# Altium PCB 4158board.PcbDoc
Units mil, origin at the board's own origin, x right, y up, seen from the top; angles counter-clockwise.
Board outline 6000 x 4000 mil, 2 copper layers (Top Layer, Bottom Layer); 29 components, 34 nets, 125 pads, 39 vias.
Unrouted connection lines stored in the file: 15.
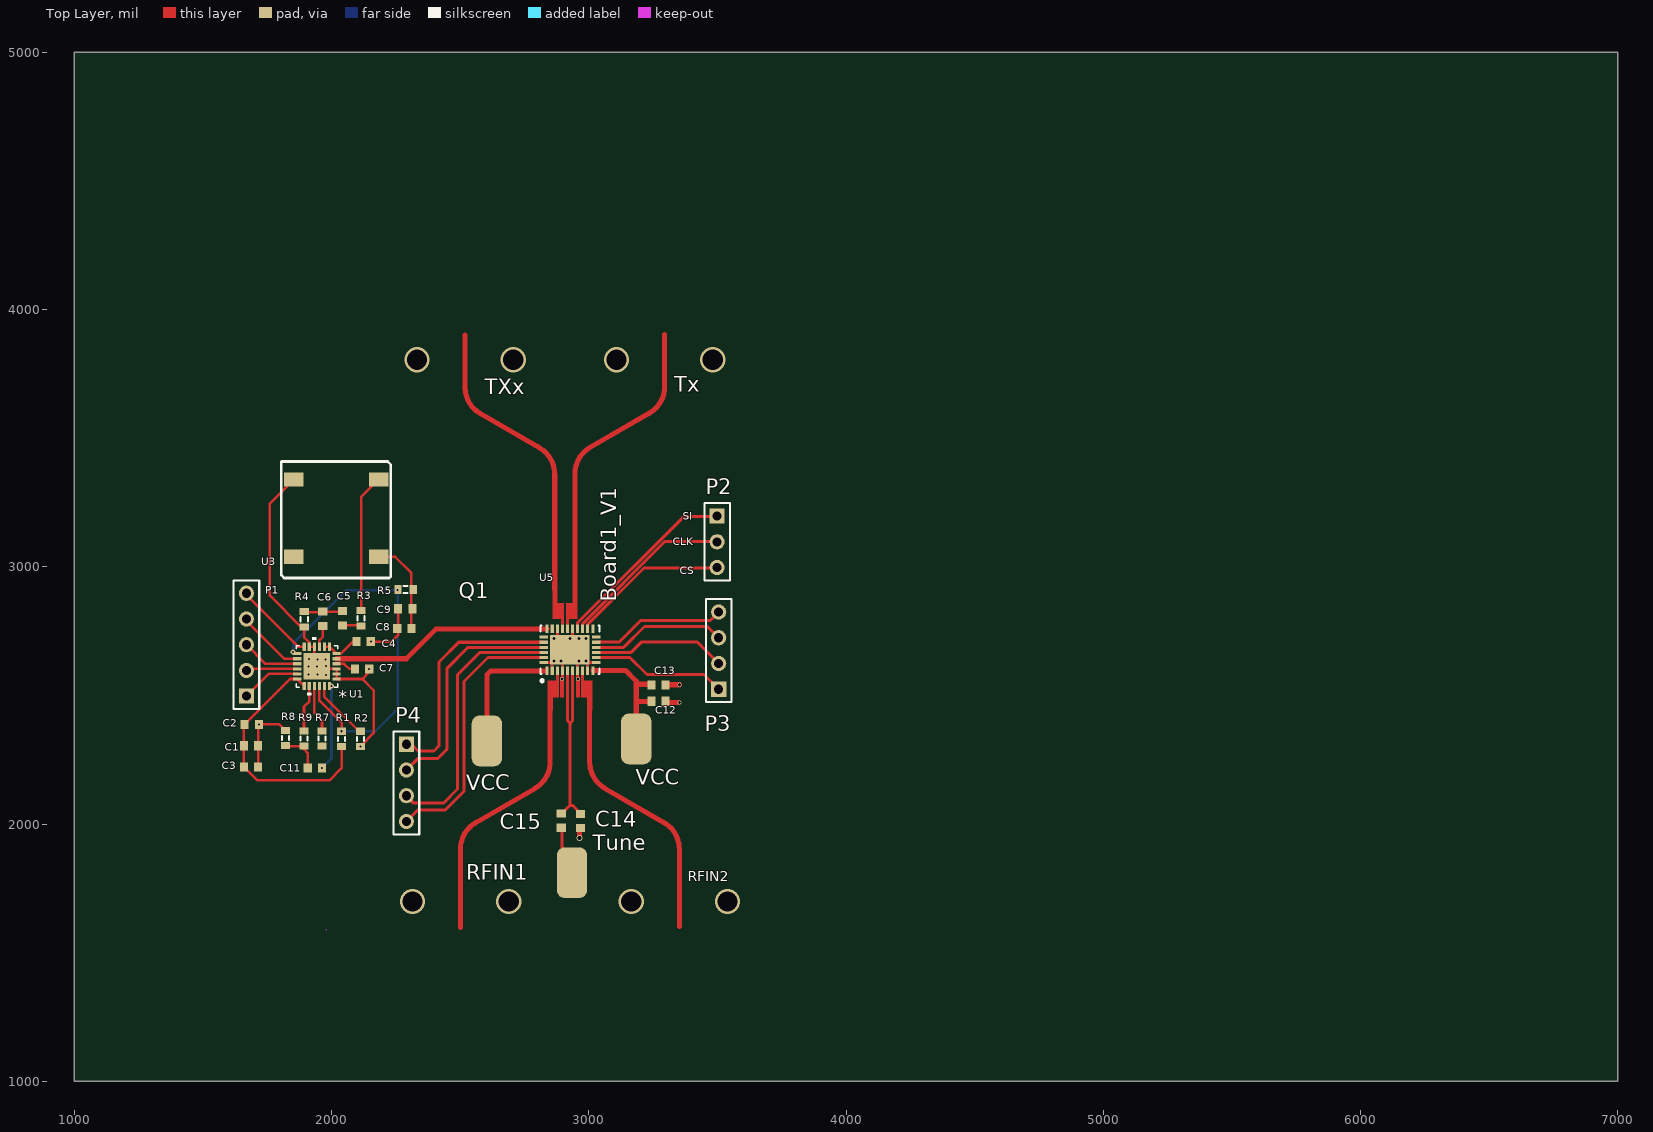
[diagram p0: Top Layer view]
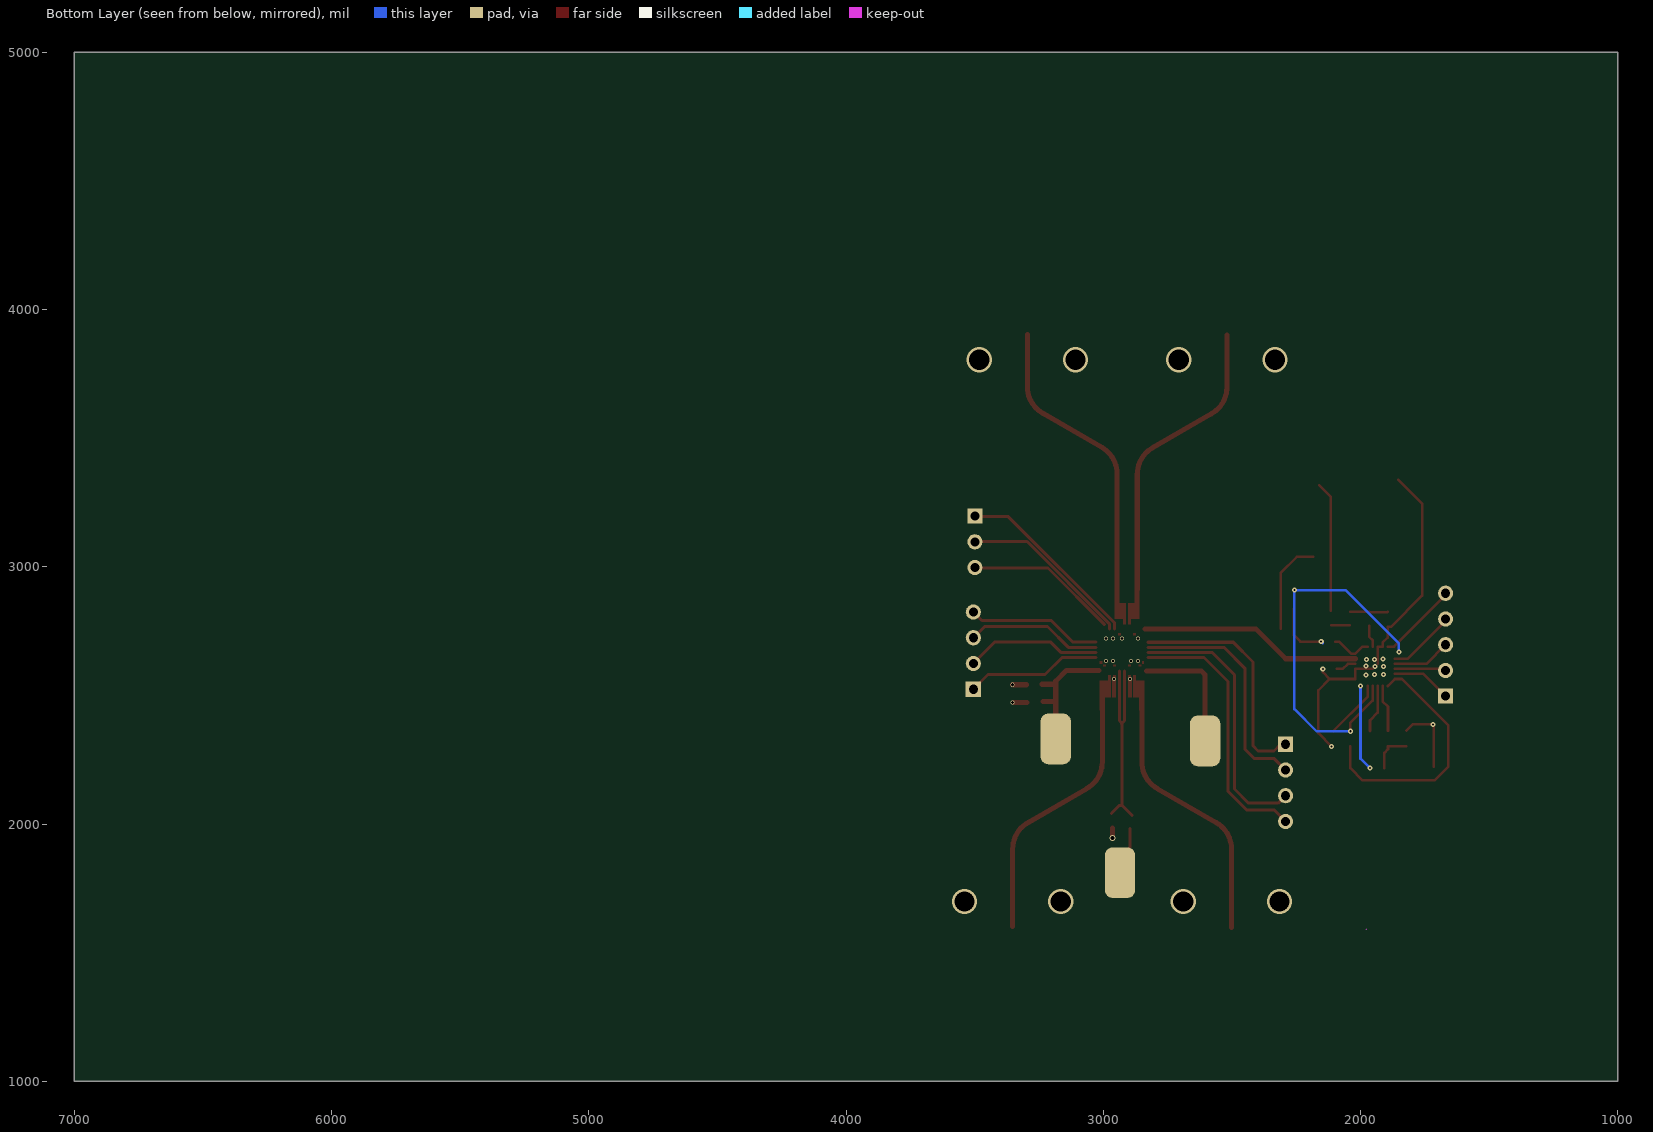
[diagram p1: Bottom Layer view, seen from below]

## Layer stack, top to bottom
Top Layer: signal copper 1.4
Dielectric: dielectric 12.6, FR-4, Dk 4.8
Bottom Layer: signal copper 1.4

## Board outline
1000,1000 7000,1000 7000,5000 1000,5000

## Design rules (kind name [scope] priority, off if disabled: settings)
Clearance [All] p1: gap=1
PolygonConnect [All] p1: connectstyle=Relief reliefconductorwidth=10 reliefentries=4 polygonreliefangle="90 Angle" airgapwidth=10
RoutingVias [All] p1: holewidth=28 width=50 viastyle="Through Hole" minholewidth=28 minwidth=50 maxholewidth=28 maxwidth=50
SolderMaskExpansion [All] p1: expansion=4
Width [All] p1: maxlimit=50 minlimit=10 preferedwidth=10
28 further rules are at their usual default settings.

## Components (designator, comment, footprint, x,y, rotation, side; value= is the part's Value field where it differs from the comment)
C1 "Cap Semi" 1608[0603] 1687,2304 r180 top
C2 "Cap Semi" 1608[0603] 1690,2387 r0 top
C3 "Cap Semi" 1608[0603] 1687,2222 r180 top
C4 "Cap Semi" 1608[0603] 2125,2709 r0 top
C5 "Cap Semi" 1608[0603] 2042,2800 r90 top
C6 "Cap Semi" 1608[0603] 1966,2798 r270 top
C7 "Cap Semi" 1608[0603] 2119,2603 r180 top
C8 "Cap Semi" 1608[0603] 2283,2760 r0 top
C9 "Cap Semi" 1608[0603] 2286.44,2837 r0 top
C11 "Cap Semi" 1608[0603] 1935,2217 r0 top
C12 "Cap Semi" 1608[0603] 3271,2477 r180 top
C13 "Cap Semi" 1608[0603] 3271,2541 r180 top
C14 "Cap Semi" 1608[0603] 2968,2012 r90 top
C15 "Cap Semi" 1608[0603] 2893,2013 r270 top
P1 "Header 5" HDR1X5 1669,2497 r90 top
P2 "Header 3" HDR1X3 3499,3197 r270 top
P3 "Header 4" HDR1X4 3505,2524 r90 top
P4 "Header 4" HDR1X4 2291,2310 r270 top
R1 "Res3" J1-0603 2039,2331 r270 top
R2 "Res3" J1-0603 2112,2331 r270 top
R3 "Res3" J1-0603 2115,2800 r270 top
R4 "Res3" J1-0603 1894,2796 r90 top
R5 "Res3" J1-0603 2288,2911 r180 top
R7 "Res3" J1-0603 1963,2332 r270 top
R8 "Res3" J1-0603 1821,2334 r90 top
R9 "Res3" J1-0603 1893,2332.53 r270 top
U1 "ADF4158CCPZ" CP_24_7 1943,2613 r180 top
U3 "CO" FOX801BE-100 2184,3039 r180 top
U5 "BGT24MTR12" QFN50P540X440X90_HS-33N 2927,2677 r90 top

## Footprints (in the part's own frame and the unit in brackets; to place one, negate y for a bottom-side part, rotate by r counter-clockwise, add the part's x,y. Pads: shape width x height; smd on the part's side, far side on the other; paste and mask are expansions set on the pad)
1608[0603] [mm] "Chip Capacitor, Body 1.6x0.8mm, IPC High Density"
  rect 0.8x0.9 smd: 1(-0.7,0) 2(0.7,0)
  body extent -0.87,-0.48 0.87,0.48, height 1.3
CP_24_7 [mil]
  rect 32x12 smd mask+5: 1(-76.5,49.21) 2(-76.5,29.53) 3(-76.5,9.84) 4(-76.5,-9.84) 5(-76.5,-29.53) 6(-76.5,-49.21) 13(76.5,-49.21) 14(76.5,-29.53) 15(76.5,-9.84) 16(76.5,9.84) 17(76.5,29.53) 18(76.5,49.21)
  rect 12x32 smd mask+5: 7(-49.21,-76.5) 8(-29.53,-76.5) 9(-9.84,-76.5) 10(9.84,-76.5) 11(29.53,-76.5) 12(49.21,-76.5) 19(49.21,76.5) 20(29.53,76.5) 21(9.84,76.5) 22(-9.84,76.5) 23(-29.53,76.5) 24(-49.21,76.5)
  rect 104x104 smd mask-51.5: 25(0,0)
  silkscreen extent -81,-112 81,112
FOX801BE-100 [mm]
  rect 1.9x1.4 smd: 1(0,0) 2(0,-7.62) 3(8.4,-7.62) 4(8.4,0)
  silkscreen extent -1.17,-9.4 9.62,2.1
HDR1X3 [mm] "Connector; Header; 3 Position"
  rect 1.5x1.5 hole 0.9: 1(0,0)
  round 1.5 hole 0.9: 2(2.54,0) 3(5.08,0)
  silkscreen extent -1.27,-1.27 6.35,1.27
HDR1X4 [mm] "Connector; Header; 4 Position"
  rect 1.5x1.5 hole 0.9: 1(0,0)
  round 1.5 hole 0.9: 2(2.54,0) 3(5.08,0) 4(7.62,0)
  silkscreen extent -1.27,-1.27 8.89,1.27
HDR1X5 [mm] "Connector; Header; 5 Position"
  rect 1.5x1.5 hole 0.9: 1(0,0)
  round 1.5 hole 0.9: 2(2.54,0) 3(5.08,0) 4(7.62,0) 5(10.16,0)
  silkscreen extent -1.27,-1.27 11.43,1.27
J1-0603 [mm] "Chip Resistor, Body 1.6x0.8mm, IPC High Density"
  rect 0.7x0.9 smd: 1(-0.75,0) 2(0.75,0)
  silkscreen extent -0.2,-0.35 0.2,0.35, body extent -0.85,-0.48 0.85,0.48, height 0.9
QFN50P540X440X90_HS-33N [mm] "QFN, 32-Leads, Body 5.40x4.40mm, Pitch 0.50mm, Thermal Pad 3.90x2.90mm, IPC Medium Density"
  rect 0.85x0.3 smd mask+0: 1(-2.075,2.25) 3(-2.075,1.25) 4(-2.075,0.75) 5(-2.075,0.25) 6(-2.075,-0.25) 7(-2.075,-0.75) 8(-2.075,-1.25) 9(-2.075,-1.75) 10(-2.075,-2.25) 17(2.075,-2.25) 18(2.075,-1.75) 19(2.075,-1.25) 20(2.075,-0.75) 21(2.075,-0.25) 22(2.075,0.25) 23(2.075,0.75) 24(2.075,1.25) 25(2.075,1.75) 26(2.075,2.25)
  rect 0.85x0.3 smd paste+0 mask+0: 2(-2.075,1.75)
  rect 0.3x0.85 smd mask+0: 11(-1.25,-2.575) 12(-0.75,-2.575) 13(-0.25,-2.575) 14(0.25,-2.575) 15(0.75,-2.575) 16(1.25,-2.575) 27(1.25,2.575) 28(0.75,2.575) 29(0.25,2.575) 30(-0.25,2.575) 31(-0.75,2.575) 32(-1.25,2.575)
  rect 2.9x3.9 smd mask+0: 33(0,0)
  Top Layer region: -6,-2.2 -4.7,-2.2 -4.7,-1.7 -6,-1.7
  Top Layer region: -6,1.7 -4.7,1.7 -4.7,2.2 -6,2.2
  Top Layer region: -4.7,-2.2 -3.05,-2.2 -3.05,-1.1 -4.7,-1.1
  Top Layer region: -3.05,-1.4 -2.5,-1.4 -2.5,-1.1 -3.05,-1.1
  Top Layer region: -4.7,1.1 -3.05,1.1 -3.05,2.2 -4.7,2.2
  Top Layer region: -3.05,1.1 -2.5,1.1 -2.5,1.4 -3.05,1.4
  Top Layer region: 4.65,-0.75 6.1,-0.75 6.1,-0.25 4.65,-0.25
  Top Layer region: 4.65,1.25 6.1,1.25 6.1,1.75 4.65,1.75
  Top Layer region: 3.049,0.6 4.649,0.6 4.649,1.75 3.049,1.75
  Top Layer region: 2.5,0.6 3.05,0.6 3.05,0.9 2.5,0.9
  Top Layer region: 3.049,-0.75 4.649,-0.75 4.649,0.4 3.049,0.4
  Top Layer region: 2.5,0.1 3.05,0.1 3.05,0.4 2.5,0.4
  Top Layer region: -1.4,1.95 -1.1,1.95 -1.1,2.175 -1.4,2.175
  Top Layer region: -1.4,-2.2 -1.1,-2.2 -1.1,-1.95 -1.4,-1.95
  silkscreen extent -3.17,-2.9 2.4,2.9

## Part data
C1 C2 C3 C4 C5 C6 C7 C8 C9 C11 C12 C13 C14 C15: "Capacitor (Semiconductor SIM Model)"
P1: "Header, 5-Pin"
P2: "Header, 3-Pin"
P3 P4: "Header, 4-Pin"
R1 R2 R3 R4 R5 R7 R8 R9: "Resistor"
U1: "Imported"

## Free pads (board coordinates)
  rrect50% 118.11x196.85 all layers, no hole: 2(2604.01,2322.8) 2(2934.72,1810.98) 2(3184.72,2330.67)

## Via types
v1: diameter 19.68, hole 7.87, Top Layer to Bottom Layer, 18 vias
v2: diameter 15.75, hole 11.81, Top Layer to Bottom Layer, 12 vias
v3: diameter 98.43, hole 78.74, Top Layer to Bottom Layer, 8 vias
v4: diameter 23.62, hole 15.75, Top Layer to Bottom Layer, 1 vias

## Nets (pads, with @x,y where several pads share a name; then routed paths per layer and width w, separated by ;. In a path a pad name is that pad's centre, name@x,y a point inside that pad or via, vN(x,y) a via of type N, cw(c..) or ccw(c..) an arc to the next point about the centre after c; other vN are vias at no path point)
3V: R1.1 R5.2 U1.13 U1.22 | length 1453.2
  Top Layer w10: U1.22 1952.84,2480.16 2039,2394 v1(2039,2360.53)
  Bottom Layer w10: v1(1851,2668) 1851,2702 2058,2909 v1(2257,2909) 2257,2447 2170.53,2360.53 v1(2039,2360.53)
GND: C1.1 C2.2 C3.1 C4.2 C7.1 C8.1 C9.1 C12.1 C13.1 C14.1 R2.2 R4.1 R8.2 U1.1 U1.2 U1.3 U1.10 U1.11 U1.25 U3.3 U5.2 U5.4 U5.7 U5.9 U5.11 U5.21 U5.24 U5.32 | length 2003.3
  Top Layer w10: C3.1 C1.1 1714.56,2384 v1(1717.56,2387) 1797.53,2387 R8.2 ; U3.3 1760,3245.71 1760,2888 1881.53,2766.47 R4.1 1894,2725 1913.47,2705.53 U1.11 U1.10 U1.25@1933.16,2622.84 ; U1.25@1952.84,2603.16 U1.3 U1.2 U1.1 2120.21,2563.79 ; v1(2112,2301.47) 2164,2353.47 2164,2520 2120.21,2563.79 ; C7.1@2146.56,2590.13 2120.21,2563.79 ; v1(2152.56,2709) 2234,2709 2258.88,2733.88 C9.1
  Top Layer w19.68: C12.1@3296.92,2472.4 v2@3348.1,2472.4 ; C13.1@3298.89,2541.3 v2(3352.04,2541.3)
  Bottom Layer w10: v1@2146.56,2703 v1(2152.56,2709)
  other v1: 1978,2580 1945,2581 1910,2582 2146.56,2603 1911,2612 1943,2613 1978,2614 1945,2640 1977,2640 1912,2641
  other v2: 3352.04,2472.4 2895.35,2562.95 2958.34,2562.95
NetC1_2: C1.2 C2.1 C3.2 R1.2 U1.18 U1.19 | length 987.2
  Top Layer w10: U1.19 U1.18 1839.23,2563.79 C2.1 1659.44,2384 C1.2 C3.2 1711.44,2170 1992,2170 2039,2217 R1.2
NetC4_1: C4.1 U1.6 U1.7 U1.8 | length 155.6
  Top Layer w10: U1.8 U1.7 U1.6 2036.21,2662.21 2083,2709 C4.1
NetC5_1: C5.1 R3.2 | length 71
  Top Layer w10: C5.1 R3.2@2113.03,2772.44
NetC5_2: C5.2 C6.1 R4.2 | length 145.1
  Top Layer w10: R4.2 1895.53,2824 C6.1@1964.44,2824 ; C6.1 C5.2@2040,2825.56
NetC6_2: C6.2 U1.9 | length 86.4
  Top Layer w10: U1.9 1952.84,2714.84 1966,2728 C6.2
NetC7_2: C7.2 U1.4 | length 80.2
  Top Layer w10: U1.4 2049.16,2622.84 2069,2603 C7.2
NetC8_2: C8.2 C9.2 R5.1 U3.1 | length 368.3
  Top Layer w10: U3.1 2247,3039 2310.56,2975.44 C8.2
NetC11_1: C11.1 R8.1 R9.2 | length 162.5
  Top Layer w10: R8.1@1822.47,2303 R9.2 1893,2291 1907.44,2276.56 C11.1
NetC11_2: C11.2 U1.24 | length 334.5
  Bottom Layer w10: v1(1962.56,2217) 2000,2254.44 v1(2000,2536)
NetC14_2: C14.2 C15.1 R7.2 U5.5 U5.6 | length 845.7
  Top Layer w11.81: C15.1@2887.47,2033.43 2926.84,2072.8 ; U5.5@2917,2595.43 2917,2401.54 2926.84,2391.69 2926.84,2072.8 ; 2928.81,2389.72 2928.81,2393.66 2936.68,2401.54 U5.6@2936.68,2595.43 ; C14.2@2968.18,2041.3 2936.68,2072.8 2926.84,2072.8
NetP1_1: P1.1 U1.17 | length 233.3
  Top Layer w10: P1.1 1755.47,2583.47 U1.17
NetP1_2: P1.2 U1.16 | length 191.3
  Top Layer w10: P1.2@1675.16,2603.16 U1.16
NetP1_3: P1.3 U1.15 | length 228.2
  Top Layer w10: P1.3 1743.16,2622.84 U1.15
NetP1_4: P1.4 U1.14 | length 258.2
  Top Layer w10: P1.4@1669,2789 1815.47,2642.53 U1.14
NetP1_5: P1.5 U1.12 | length 290.9
  Top Layer w10: P1.5@1681,2878 1869.5,2689.5 U1.12
NetP2_1: P2.1 U5.20 | length 728.2
  Top Layer w12: U5.20 2956.53,2782.53 3369,3195 P2.1@3490,3195
NetP2_2: P2.2 U5.19 | length 675.8
  Top Layer w12: U5.19 2976.21,2778.21 3296,3098 P2.2@3500,3098
NetP2_3: P2.3 U5.18 | length 593.9
  Top Layer w12: 2995.9,2775.9 3215,2995 P2.3@3499,2995
NetP3_1: P3.1 U5.12 | length 528
  Top Layer w11.81: U5.12@3028.22,2647.6 3159.4,2647.6 3226,2581 3448,2581 P3.1
NetP3_2: P3.2 U5.13 | length 495.2
  Top Layer w11.81: U5.13@3028.22,2667.28 3165,2667.28 3205.72,2708 3421,2708 3481.5,2647.5
NetP3_3: P3.3 U5.14 | length 528.6
  Top Layer w11.81: U5.14@3028.22,2686.97 3135.5,2686.97 3216.54,2768 3461,2768 P3.3
NetP3_4: P3.4 U5.15 | length 522.6
  Top Layer w11.81: U5.15@3028.22,2706.65 3117.79,2706.65 3202.13,2791 3472,2791 P3.4@3503,2822
NetP4_1: P4.1 U5.28 | length 892.4
  Top Layer w11.81: P4.1@2310,2310 2336,2284 2398,2284 2418,2304 2418,2630 2494.53,2706.53 U5.28
NetP4_2: P4.2 U5.29 | length 916.1
  Top Layer w11.81: P4.2 2335,2254 2412,2254 2448,2290 2448,2604 2530.84,2686.84 U5.29
NetP4_3: P4.3 U5.30 | length 1049.5
  Top Layer w11.81: P4.3 2320,2081 2435,2081 2490,2136 2490,2580 2577.16,2667.16 U5.30
NetP4_4: P4.4 U5.31 | length 1048.8
  Top Layer w11.81: P4.4 2336,2055 2443,2055 2515,2127 2515,2554 2608.47,2647.47 U5.31
NetR2_1: R2.1 U1.23 | length 231.5
  Top Layer w10: U1.23 1972.53,2494.47 R2.1@2106.47,2360.53
NetR3_1: R3.1 U3.2 | length 505.4
  Top Layer w10: R3.1 2115,3272 U3.2@2159.5,3316.5
NetR7_1: R7.1 U1.21 | length 187.3
  Top Layer w10: U1.21 1933.16,2432.84 1963,2403 R7.1
NetR9_1: R9.1 U1.20 | length 182.9
  Top Layer w10: R9.1 1893,2456 1913.47,2476.47 U1.20
NetU1_5: U1.5 U5.26 | length 867
  Top Layer w19.68: U1.5 2290.53,2642.53 2406.69,2758.69 U5.26
VCC: C12.2 C13.2 pad.2@2604.01,2322.8 pad.2@3184.72,2330.67 U5.1 U5.10 | length 1003
  Top Layer w19.68: pad.2@2604.01,2322.8 2604.01,2580.67 2618.77,2595.43 ; 2618.93,2595.31 2831,2595.31 ; U5.10@3016.41,2596.42 3143.38,2596.42 3184.72,2555.08 3184.72,2543.27 ; pad.2@3184.72,2330.67 3184.72,2476.34 ; C12.2@3233.93,2476.34 3184.72,2476.34 ; C13.2@3237.87,2543.27 3184.72,2543.27 ; 3184.72,2476.34 3184.72,2543.27
pads on no net: C15.2 U3.4 U5.3 U5.8 U5.16 U5.17 U5.22 U5.23 U5.25 U5.27 U5.33
copper on no net: | length 4547.7
  Top Layer w11.81: 2895.35,1982.24 2895.35,1909.41 2942.59,1862.17 2942.59,1844.45
  Top Layer w19.68: 2501.65,1598.39 2501.65,1899.57 ; 2501.65,1903.11 cw(c2619.76,1903.11) 2560.7,2005.4 ; 2519.36,3901.54 2519.36,3697.68 ccw(c2637.47,3697.68) 2578.42,3595.39 ; 2560.67,2005.39 2789.71,2137.64 ; 2579.73,3594.33 2808.76,3462.09 cw(c2749.68,3359.8) 2867.79,3359.8 ; 2791.02,2138.7 ccw(c2731.96,2240.98) 2850.07,2240.98 2850.07,2444.84 ; 2867.79,2911.38 2867.79,3356.26 ; 2946.53,2913.35 2946.53,3358.23 ; 2946.53,3361.77 cw(c3064.64,3361.77) 3005.58,3464.06 ; v4(2964.24,1944.84) 2964.24,1984.21 ; 3003.61,2444.84 3003.61,2240.98 ccw(c3121.72,2240.98) 3062.67,2138.7 ; 3005.55,3464.06 3234.59,3596.3 ; 3063.98,2137.64 3293.02,2005.39 cw(c3233.93,1903.11) 3352.04,1903.11 ; 3235.9,3597.36 ccw(c3176.84,3699.65) 3294.95,3699.65 3294.95,3903.5 ; 3352.04,1602.32 3352.04,1899.57
  other v2: 2864.01,2633.69 2891.57,2633.69 2962.43,2633.69 2989.99,2633.69 2864.01,2720.31 2927,2720.31 2962.43,2720.31 2989.99,2720.31
  other v3: 2314.64,1698.78 2688.65,1698.78 3165.03,1698.78 3539.05,1698.78 2332.35,3805.08 2706.37,3805.08 3107.94,3805.08 3481.96,3805.08

## Keep-outs
Keep-Out Layer:
  lines w1: 1978.02,1590.51 1979.99,1588.54

## Other copper
Top Layer:
  rectangle net GND: 2950.46,2570.83 2962.28,2578.7
  rectangle net GND: 2891.41,2570.83 2903.22,2578.7
  rectangle net GND: 2950.46,2492.09 2966.21,2570.83
  rectangle net GND: 2887.47,2492.09 2903.22,2570.83
  rectangle net GND: 2871.72,2733 2883.54,2742.09
  rectangle net GND: 2930.78,2733 2942.59,2742.09
  rectangle net GND: 2852.04,2612 2863.85,2620.04
  rectangle net GND: 2891.41,2612 2903.22,2620.04
  rectangle net GND: 2950.46,2612 2962.28,2620.04
  rectangle net GND: 2989.83,2612 3001.65,2620.04

## Silkscreen, mask and mechanical layers (free items; w line width, h text height)
Top Overlay:
  text "Tx" at 3332.35,3681.06 h60
  text "TXx" at 2596.13,3671.22 h60
  text "SI" at 3365,3182 h30
  text "CLK" at 3327,3083 h30
  text "CS" at 3353,2970 h30
  text "Q1" at 2494,2877 h60
  text "Board1_V1" at 3105.98,2864.13 h60 r90
  text "VCC" at 3182.75,2153.5 h60
  text "VCC" at 2523.3,2131.85 h60
  text "Tune" at 3015.43,1897.6 h60
  text "RFIN1" at 2523.3,1783.43 h60
  text "RFIN2" at 3385.5,1777.52 h39.37
Mechanical 1:
  lines w10: 1529,1606 1534,1601 3637,1601 3637,3912 1529,3912 1529,1606

## Text inside footprints (layer, text, board x,y; h text height)
U1: Top Overlay "*" at 2060.5,2538.94 h50 r180; Mechanical 13 "*" at 2060.5,2538.94 h50 r180